# Altium PCB CH32H417QEU-R1.PcbDoc (part 6 of 6)
Units mm, origin at the board's own origin, x right, y up, seen from the top; angles counter-clockwise.
Board outline 125 x 85 mm, 4 copper layers (Top Layer, Layer 1, Layer 2, Bottom Layer), stack 0.603 mm thick; 271 components, 256 nets, 1068 pads, 903 vias.
Unrouted connection lines stored in the file: 143.
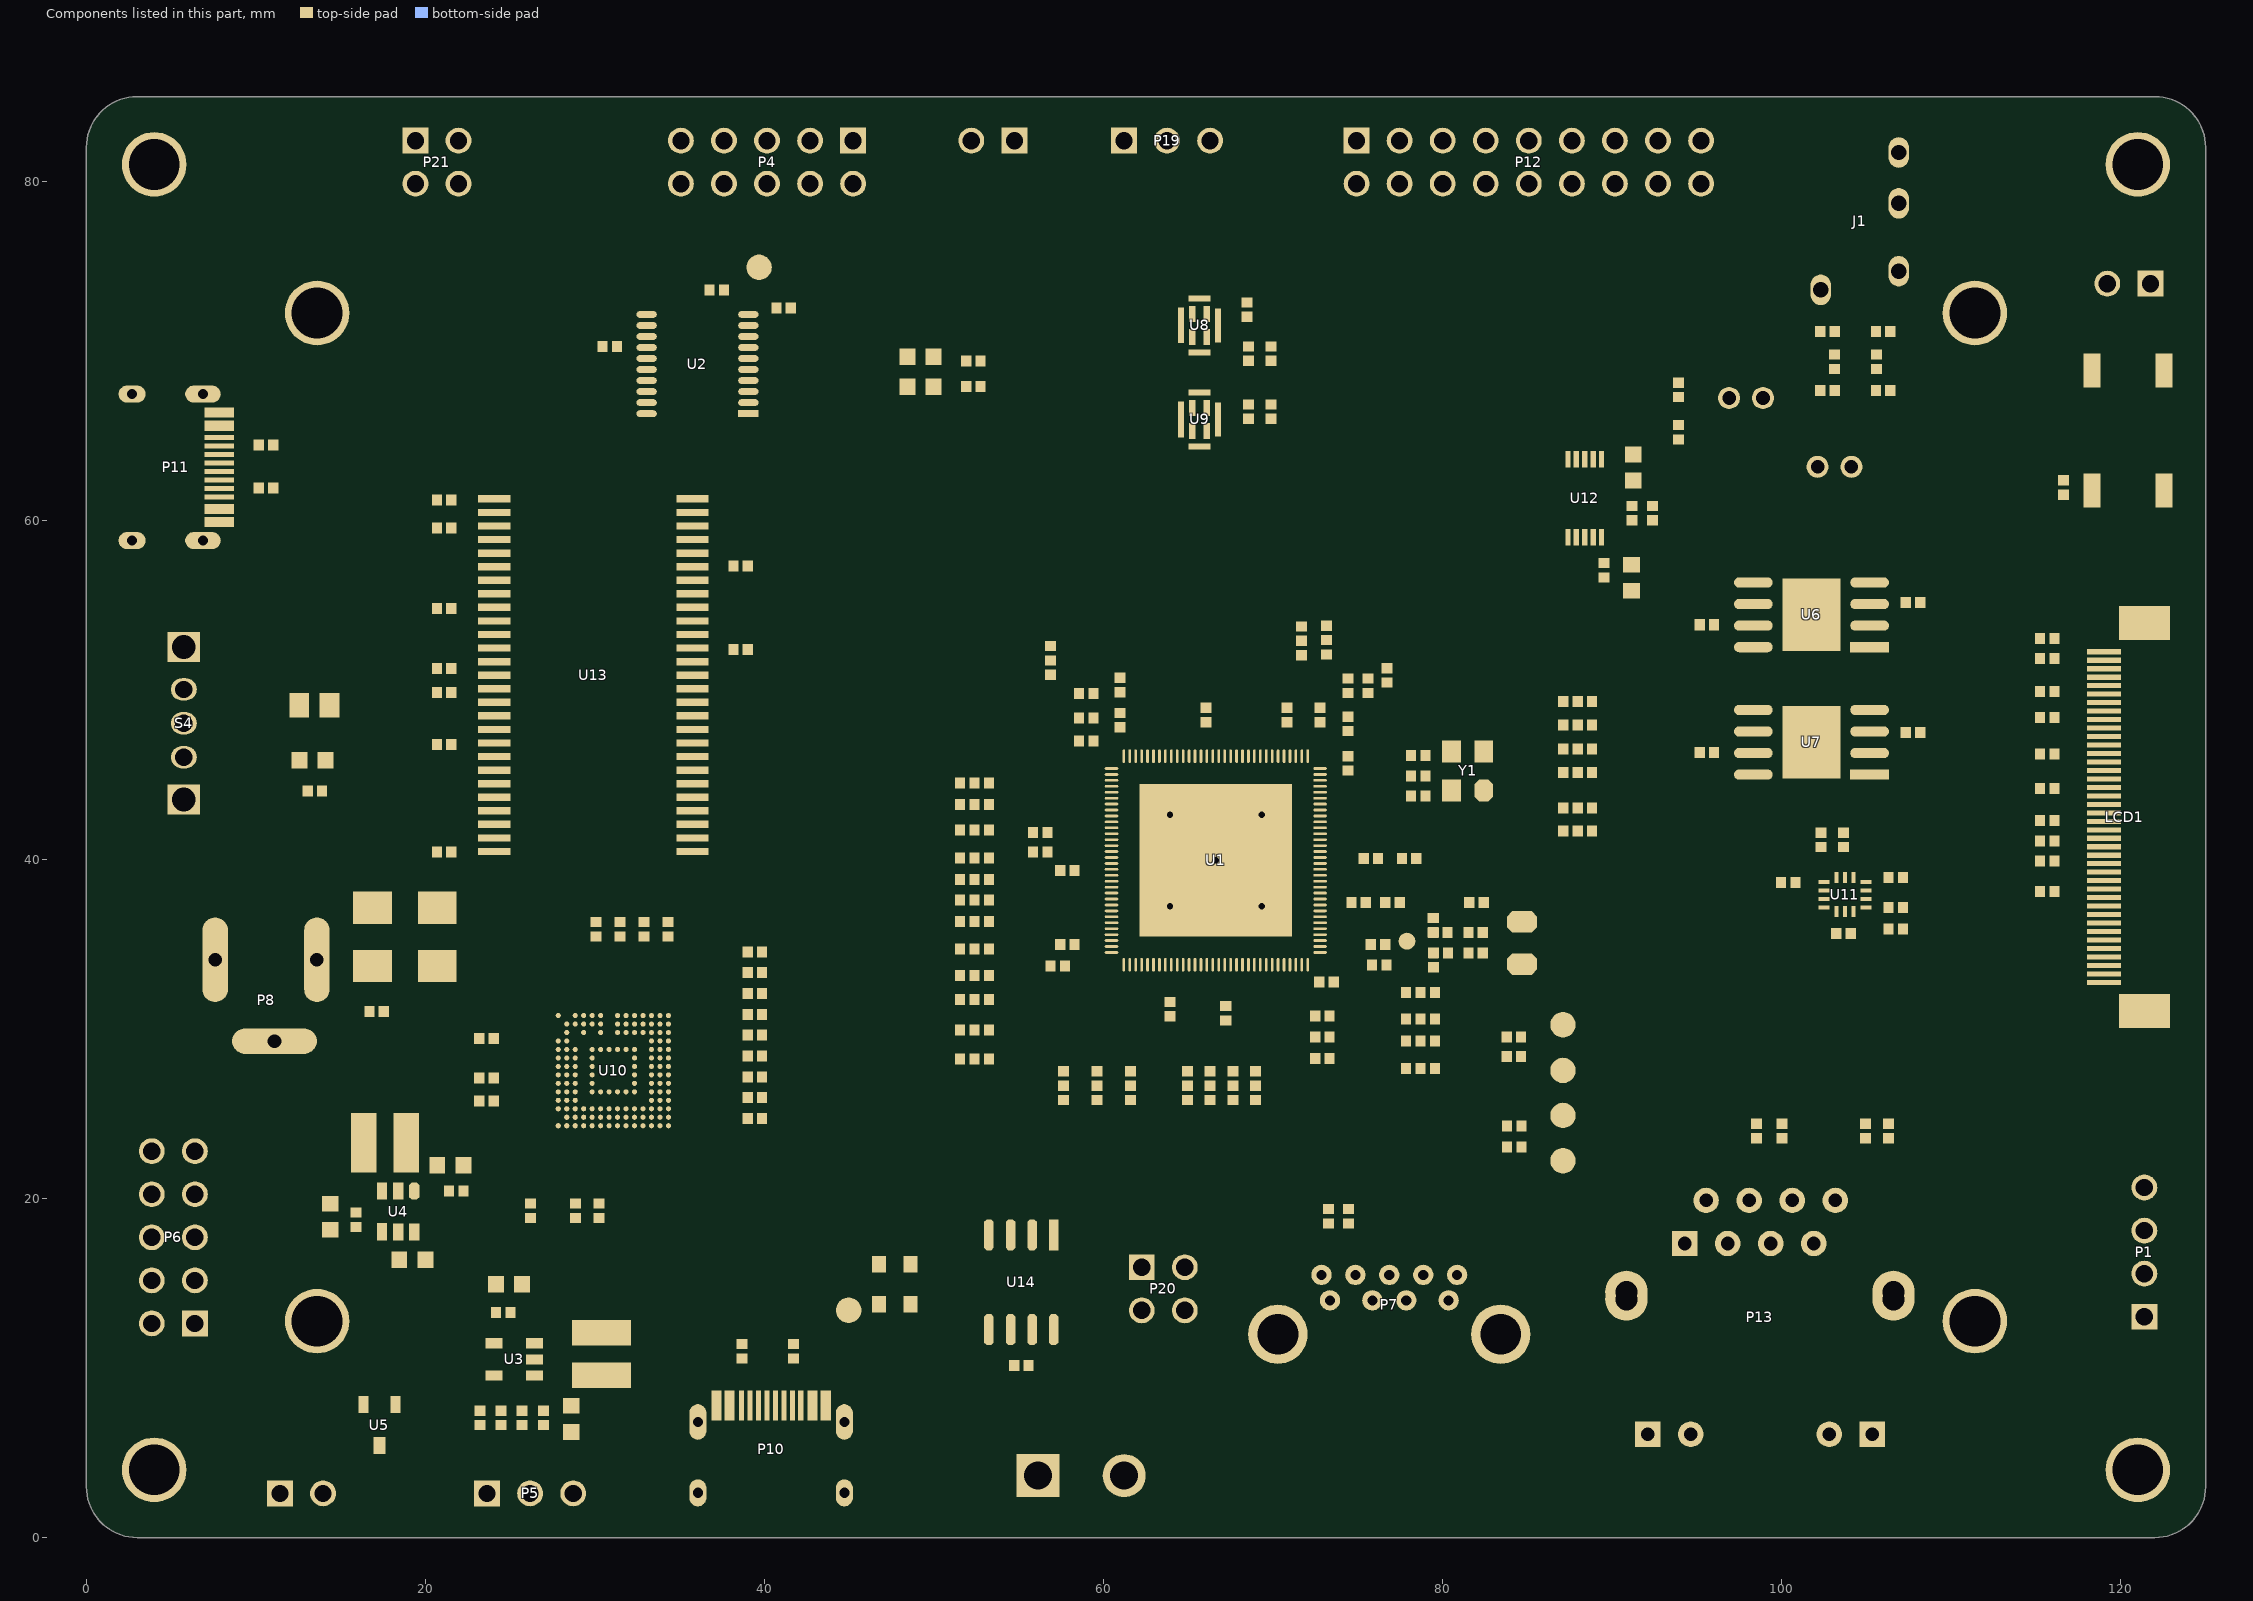
[diagram p8: the components of this part, seen from the top]

## Polygon pours and split planes (outlines as drawn) (continued)
5V on Layer 2 "5V" (solid, remove dead copper, pour order 13): 51.021,7.665 51.021,10.965 51.224,11.168 52.706,11.168 52.787,11.088 52.787,8.254 52.931,8.122 64.641,8.122 67.034,5.728 83.098,5.728 84.885,3.941 113.87,3.941 114.168,4.238 114.168,32.032 114.285,32.149 116.479,32.149 116.638,31.991 116.638,1.907 115.921,1.19 81.576,1.19 80.204,2.562 66.001,2.562 62.716,5.847 54.629,5.847 52.537,3.755 31.54,3.755 29.236,6.06 21.88,6.06 21.726,6.214 21.726,12.354 21.913,12.541 23.726,12.541 23.866,12.397 23.866,8.065 24.069,7.862 30.714,7.862 33.198,5.377 48.733,5.377
LDO_3V3 on Layer 2 "LDO_3V3" (solid, remove dead copper, pour order 14): 19.546,15.581 19.367,15.76 17.639,15.76 17.559,15.68 17.559,3.733 17.68,3.612 27.494,3.612 27.764,3.342 27.764,1.614 27.883,1.531 29.809,1.531 29.882,1.605 29.882,5.065 29.138,5.809 20.107,5.809 19.546,6.37
VBUS_5V on Layer 2 "VBUS_5V" (solid, remove dead copper, pour order 15): 45.265,15.097 57.362,15.097 59.137,13.282 61.26,11.148 67.078,11.148 68.543,9.684 71.996,9.684 72.011,9.669 72.26,9.919 72.26,14.422 72.451,14.613 74.05,14.613 74.327,14.335 74.327,7.253 73.665,6.592 67.164,6.592 65.163,8.593 58.701,8.593 54.377,12.918 19.897,12.918 19.778,13.036 19.769,15.742 19.605,15.905 11.01,15.905 10.513,15.408 10.513,14.34 10.376,14.203 5.651,14.203 5.505,14.32 5.505,15.905 5.821,16.221 7.438,16.221 7.884,16.667 7.884,17.926 8.01,18.052 19.982,18.052 22.937,15.097
VBUS_FS on Layer 2 "VBUS_FS" (solid, remove dead copper, pour order 16): 5.879,21.817 7.63,21.817 11.077,18.37 19.958,18.37 23.001,15.327 46.814,15.327 47.407,15.92 47.407,18.329 47.366,18.37 40.909,18.37 39.841,17.302 23.91,17.302 20.218,20.994 11.754,20.994 8.912,23.836 5.881,23.836 5.647,23.602 5.647,21.995
VBUS_CC on Layer 2 "VBUS_CC" (solid, remove dead copper, pour order 17): 36.008,10.138 35.939,10.068 35.939,8.252 36.133,8.057 44.388,8.057 44.465,8.135 44.465,9.982 44.31,10.138
3V3 on Layer 2 "3V3" (solid, remove dead copper, pour order 19): 21.501,26.506 21.604,26.608 25.164,26.608 25.169,26.613 25.222,26.56 25.222,20.922 25.137,20.837 23.887,20.837 23.808,20.916 23.808,24.448 23.667,24.59 21.579,24.59 21.501,24.667
VIO_1.8 on Layer 2 "VIO_1.8" (solid, remove dead copper, pour order 22): 58.37,41.218 58.37,39.828 58.31,39.768 56.329,39.768 56.269,39.704 56.27,36.985 56.463,36.792 57.59,36.792 59.924,34.458 59.924,32.183 60.124,31.982 64.803,31.982 64.865,31.92 64.865,31.252 64.775,31.162 59.141,31.162 58.929,31.374 58.929,33.618 58.755,33.793 58.117,33.793 58.095,33.821 58.095,35.104 57.314,35.884 55.439,35.884 55.308,36.015 55.308,40.085 55.774,40.551 56.478,40.551 59.516,43.589 61.164,43.589 62.314,44.739 62.314,49.086 62.065,49.335 61.378,49.335 61.317,49.397 61.317,50.423 61.357,50.46 63.348,50.46 63.468,50.34 63.468,44.822 61.303,42.658 59.81,42.658
VDDIO on Layer 2 "VDDIO" (solid, remove dead copper, pour order 24): 66.038,45.976 71.734,45.974 71.76,45.974 71.765,45.969 71.788,45.993 71.788,47.303 71.853,47.367 75.234,47.367 75.311,47.274 75.311,45.922 75.35,45.883 75.878,45.883 75.881,45.881 75.982,45.983 75.982,48.558 75.883,48.657 69.887,48.657 69.852,48.621 69.852,46.956 69.824,46.927 65.989,46.927 65.796,47.121 65.796,48.843 65.688,48.935 63.814,48.935 63.694,48.815 63.694,44.759 61.485,42.55 59.991,42.55 58.575,41.134 58.575,36.144 60.141,34.578 60.141,33.334 60.202,33.274 65.805,33.274 65.983,33.096 65.983,31.028 66.046,30.965 71.483,30.965 72.363,31.844 74.945,31.844 76.068,32.968 76.069,33.971 75.977,34.063 74.935,34.063 74.917,34.045 74.917,33.681 74.806,33.57 66.978,33.57 66.222,34.358 61.433,34.358 61.32,34.471 61.32,35.484 59.52,37.284 59.52,40.715 60.554,41.749 61.811,41.749
VDDK on Layer 2 "VDDK" (solid, remove dead copper, pour order 7): 56.742,33.437 57.233,33.928 57.233,34.595 57.003,34.825 56.297,34.836 51.232,34.836 51.22,34.824 51.065,34.979 51.065,43.154 51.154,43.242 56.41,43.242 56.587,43.065 56.587,42.395 56.285,42.093 52.27,42.093 52.195,42.019 52.195,35.883 52.377,35.701 57.118,35.701 57.839,34.98 57.839,33.843 57.438,33.429 57.438,26.359 57.824,25.973 69.801,25.973 72.537,28.709 80.919,28.709 81.43,29.22 81.43,36.713 81.276,36.866 80.19,36.866 80.109,36.947 80.109,37.883 80.216,37.99 82.218,37.99 82.295,37.913 82.295,27.967 82.181,27.852 73.057,27.852 72.202,26.997 72.202,25.127 71.976,24.901 56.861,24.901 56.742,25.02
VDD33 on Layer 2 "VDD33" (solid, remove dead copper, pour order 8): 76.959,40.771 77.045,40.857 77.853,40.857 77.968,40.742 77.968,39.256 77.76,39.02 77.76,32.893 76.129,31.262 76.129,29.328 75.615,28.815 72.438,28.815 69.752,26.129 57.95,26.129 57.476,26.603 57.476,33.434 57.517,33.605 58.635,33.605 58.728,33.512 58.728,28.644 60.194,27.178 69.318,27.178 71.852,29.712 74.211,29.712 74.991,30.491 74.991,31.018 76.959,32.986
GND on Layer 2 "GND-L3" (solid, remove dead copper, pour order 27): -0.027,85.08 -0.027,-0.004 124.922,-0.004 124.922,84.845
Link_5V on Layer 2 "Link_5V" (solid, remove dead copper, pour order 12): 12.054,59.857 12.054,66.49 11.979,66.565 8.602,66.565 8.325,66.288 8.325,54.883 7.887,54.421 7.887,41.789 7.259,41.161 3.001,41.161 2.581,40.741 2.581,25.649 2.708,25.522 7.376,25.522 7.54,25.685 7.54,28.515 7.43,28.624 6.616,28.624 6.337,28.902 6.337,37.768 6.532,37.963 10.826,37.963 12.054,39.191
3V3 on Layer 2 "3V3" (solid, remove dead copper, pour order 10): 73.574,80.131 73.574,81.328 73.751,81.505 75.727,81.505 75.781,81.559 75.781,83.059 75.664,83.176 70.742,83.176 70.679,83.113 70.679,80.84 70.625,80.802 59.722,80.802 59.59,80.67 59.59,80.605 59.582,75.946 59.582,75.602 59.414,75.433 39.027,75.433 38.613,75.847 38.613,80.567 38.365,80.815 36.984,80.815 36.751,80.583 36.751,59.92 36.477,59.646 23.386,59.646 19.406,55.665 19.406,37.541 19.667,37.28 32.888,37.28 33.495,36.673 33.495,28.672 32.607,27.784 31.556,27.784 31.425,27.652 31.425,25.692 31.638,25.559 35.29,25.559 36.071,26.341 36.071,41.339 35.958,41.452 24.353,41.452 23.62,42.184 23.62,55.011 23.87,55.261 55.946,55.261 56.155,55.065 56.155,50.337 55.895,50.1 51.311,50.1 48.677,47.465 48.677,31.892 49.062,31.507 56.115,31.507 56.658,32.049 56.658,33.488 57.095,33.925 57.095,34.517 56.999,34.613 56.223,34.613 55.691,34.081 55.691,33.052 55.546,32.907 51.146,32.907 50.648,33.404 50.648,46.195 51.025,46.571 55.953,46.571 58.41,49.028 58.41,50.023 58.382,50.023 57.615,50.789 57.615,54.124 62.417,58.926 62.417,77.167 63.34,78.09 70.701,78.09 71.838,76.952 71.838,73.277 72.835,72.28 72.835,66.794 72.508,66.467 69.12,66.467 68.957,66.304 68.957,64.163 69.337,63.784 86.005,63.784 86.086,63.865 86.086,66.169 85.951,66.304 76.492,66.304 76.289,66.507 76.289,72.327 74.384,74.232 74.384,79.311
Link_5V on Bottom Layer "Link_5V" (solid, remove dead copper, pour order 11): 5.582,27.566 5.582,25.681 5.709,25.554 8.178,25.554 8.378,25.354 8.378,18.897 8.102,18.621 5.741,18.621 5.579,18.479 5.579,16.671 5.705,16.545 10.562,16.545 11.214,17.197 11.214,27.52 11.045,27.688 5.704,27.688
3V3 on Bottom Layer "3V3" (solid, remove dead copper, pour order 20): 23.846,22.256 25.475,22.256 25.535,22.196 25.535,17.402 21.634,13.501 21.634,6.903 21.898,6.639 27.035,6.639 27.155,6.519 27.155,2.046 26.834,1.725 25.352,1.725 25.286,1.792 25.286,4.059 25.043,4.302 19.816,4.302 19.534,4.584 19.534,14.249 23.785,18.5 23.785,22.168
3V3 on Bottom Layer "3V3" (solid, remove dead copper, pour order 18): 22.86,25.403 21.097,25.403 21.003,25.496 21.003,40.072 21.118,40.187 22.899,40.187 22.95,40.13 22.95,25.492
VIO_1.8 on Bottom Layer "VIO_1.8" (solid, remove dead copper, pour order 21): 77.223,50.371 77.224,50.37 77.324,50.47 77.324,51.541 77.374,51.592 78.311,51.592 78.377,51.526 78.377,49.774 78.229,49.627 70.628,49.627 69.124,51.13 67.512,51.13 67.277,50.895 67.277,46.311 67.056,46.089 60.151,46.089 59.829,46.411 57.149,46.411 55.932,47.628 55.932,50.482 55.131,51.283 55.131,52.55 55.194,52.606 56.969,52.606 57.13,52.445 57.13,47.615 57.336,47.409 61.922,47.409 62.139,47.625 62.139,49.159 61.97,49.328 61.481,49.328 61.38,49.429 61.38,50.458 61.431,50.508 63.576,50.508 63.652,50.432 63.652,47.082 63.775,46.96 66.295,46.96 66.493,47.158 66.493,52.206 66.518,52.231 69.153,52.231 71.013,50.371
VDDIO on Bottom Layer "VDDIO" (solid, remove dead copper, pour order 23): 60.622,52.299 60.575,52.252 60.575,51.539 60.568,51.532 60.589,51.51 63.988,51.51 64.137,51.362 64.137,47.936 64.271,47.802 65.842,47.802 65.945,47.905 65.945,48.77 65.89,48.825 65.096,48.825 65.001,48.92 65.001,52.211 64.913,52.299
3V3 on Bottom Layer "3V3" (solid, remove dead copper, pour order 25): 57.365,50.133 57.365,48.79 57.501,48.653 60.134,48.653 60.468,48.987 60.468,52.219 60.783,52.534 68.848,52.534 70.935,50.447 74.133,50.447 74.208,50.522 74.208,51.033 74.033,51.208 71.387,51.208 69.184,53.411 60.251,53.411 58.857,52.017 58.857,50.408 58.64,50.191 57.395,50.191
GND on Bottom Layer "GND-L4" (solid, remove dead copper, pour order 28): -0.033,84.992 -0.033,-0.045 125.294,-0.045 125.294,85.136 125.13,85.136
GND on Layer 1 "GND" (solid, remove dead copper, pour order 0): -0.326,85.412 -0.326,-0.204 125.095,-0.204 125.095,85.236

## Keep-outs
Keep-Out Layer:
  the board outline again, w0.254

## Other copper
Top Layer:
  rectangle net 5V: 13.841,48.272 17.35,50.388
  rectangle net VBUS_FS: 44.594,15.237 49.11,17.466
  region net 1V2: 18.785,22.832 21.666,22.832 21.906,22.592 21.906,18.837 21.593,18.524 19.116,18.524 19.073,18.482 19.073,17.499 19.176,17.397 23.336,17.397 23.618,17.679 23.618,23.974 23.344,24.248 18.851,24.248
  region net VIO_1.8: 25.925,19.42 30.588,19.42 30.654,19.486 30.654,20.037 28.41,20.037 28.362,20.085 28.362,20.379 28.287,20.453 25.911,20.453 25.84,20.383 25.84,19.499
  region net Link_5V: 7.121,60.404 8.813,60.404 8.96,60.257 8.96,59.725 9.028,59.657 10.098,59.657 10.197,59.756 10.197,60.932 10.076,61.053 8.781,61.053 8.702,60.974 7.125,60.974
  region net Link_5V: 9.04,66.146 9.04,66.482 9.18,66.622 10.127,66.622 10.179,66.57 10.179,65.182 10.094,65.096 9.023,65.096 8.833,65.287 7.353,65.287 7.324,65.772 7.415,65.862 8.757,65.862
  region net LDO_3V3: 18.702,18.388 18.702,17.332 18.977,17.057 18.977,16.043 19.444,15.575 19.444,14.284 19.378,14.218 18.068,14.218 17.975,14.31 17.975,17.024 18.09,17.139 18.09,18.397 18.119,18.426 18.664,18.426
  region net VBUS_CC: 38.242,10.054 38.189,10.107 36.415,10.107 36.333,10.025 36.333,8.886 36.357,8.862 37.537,8.862 37.636,8.763 37.636,6.976 38.201,6.969 38.242,7.009
  region net VBUS_CC: 49.2,11.857 49.317,11.974 49.317,14.416 49.217,14.529 43.917,14.529 43.108,13.719 43.108,10.453 42.57,9.915 42.57,7.322 43.108,7.337 43.108,8.816 43.284,8.992 44.209,8.992 45.344,10.127 45.344,11.742 45.459,11.857
  region net PIN_5V: 5.843,13.526 7.951,13.526 8.159,13.319 8.159,9.134 8.415,8.879 16.721,8.879 16.878,8.722 16.878,7.121 16.77,7.013 5.83,7.013 5.601,7.242 5.601,13.404
  region net 5V_IN: 18.275,6.092 10.626,6.092 10.29,5.756 10.29,1.699 10.498,1.49 12.182,1.49 12.278,1.586 12.278,3.735 12.663,4.12 18.307,4.12 18.419,4.232 18.419,5.948
  region net DC_3V3: 29.658,10.235 29.658,7.067 29.489,6.898 23.999,6.898 23.891,6.79 23.891,5.499 22.753,4.361 22.753,1.762 22.892,1.623 24.43,1.623 24.706,1.9 24.706,3.838 24.691,3.853 26.121,5.283 30.873,5.283 31.503,5.914 31.503,10.204
  pour cut-out: 68.678,25.043 69.445,24.276 69.445,12.056 70.674,10.827 81.523,10.827 82.451,11.755 82.451,21.444 75.001,28.894 75.001,31.171 74.32,31.852 72.873,31.852 71.996,32.729 71.996,34.091 71.799,34.288 68.872,34.288 68.728,34.143
  pour cut-out: 72.445,38.152 86.36,38.152 91.092,33.421 91.092,15.247 92.787,13.552 99.699,13.552 101.825,15.678 101.825,23.455 101.32,23.96 98.078,23.96 97.924,24.113 97.924,39.369 96.217,41.077 80.957,41.077 79.555,39.675 72.245,39.675 72.132,39.562 72.132,38.236
  pour cut-out: 61.033,45.65 72.31,45.65 72.31,34.409 61.006,34.409
  pour cut-out: 28.377,12.86 28.377,8.83 32.346,8.83 32.346,12.832
  pour cut-out: 15.608,25.303 15.608,21.554 19.54,21.554 19.54,25.303
Layer 1:
  rectangle net GND: 62.851,36.144 70.4,43.795
Layer 2:
  region net GND: 61.957,41.529 64.233,43.805 70.23,43.805 70.865,43.17 70.865,36.621 70.366,36.122 63.227,36.122 61.811,37.538 61.811,41.468
Bottom Layer:
  region net GND: 62.437,43.427 69.345,43.427 69.999,42.773 69.999,36.714 69.769,36.484 62.72,36.484 62.013,37.19 62.013,43.091

## Silkscreen, mask and mechanical layers (free items; w line width, h text height)
Top Overlay:
  region: 71.836,82.995 73.158,82.457 71.866,81.875 72.11,82.422
  region: 71.836,77.617 73.158,77.078 71.866,76.496 72.11,77.043
  region: 32.12,83.055 33.442,82.517 32.15,81.935 32.394,82.481
  region: 45.369,77.16 46.691,76.621 45.398,76.039 45.643,76.586
  lines w0.152: 21.937,8.587 21.937,5.508 27.046,5.508 27.046,5.84 ; 46.606,74.649 55.314,74.649 ; 73.681,73.818 96.443,73.818 ; 77.819,46.984 77.819,50.615 78.692,50.615 ; 80.813,41.499 80.508,41.499 80.508,37.337 80.864,37.337
  text "LINK_RST" at 10.756,81.917 h0.89
  text "MCU_RST" at 23.988,81.917 h0.89
  text "LINK_RST" at 46.843,81.904 h0.89 r270
  text "PIOC_IO0" at 60.383,80.734 h0.89 r270
  text "HSADC" at 63.15,80.734 h0.89 r270
  text "GND" at 65.768,80.734 h0.89 r270
  text "GND" at 50.078,79.435 h0.89
  text "LK_RST" at 53.254,79.287 h0.89
  text "LINK_RX" at 11.644,79.06 h0.89
  text "MCU_TX" at 23.988,79.06 h0.89
  text "3V3" at 74.294,78.462 h0.89 r270
  text "VSYNC" at 76.833,78.462 h0.89 r270
  text "HSYNC" at 79.373,78.462 h0.89 r270
  text "RESET" at 81.912,78.462 h0.89 r270
  text "D1" at 84.452,78.462 h0.89 r270
  text "D3" at 86.991,78.462 h0.89 r270
  text "D5" at 89.531,78.462 h0.89 r270
  text "D7" at 92.07,78.462 h0.89 r270
  text "LINK" at 54.535,78.349 h0.89 r270
  text "TDO" at 50.147,77.608 h0.89 r270
  text "_TX" at 51.751,77.608 h0.89 r270
  text "_RX" at 53.318,77.608 h0.89 r270
  text "TDI" at 48.544,77.312 h0.89 r270
  text "PC13" at 116.747,75.581 h0.89
  text "KEY" at 121.174,75.581 h0.89
  text "5V" at 46.94,74.48 h0.89 r270
  text "3V3" at 48.619,74.48 h0.89 r270
  text "GND" at 50.298,74.48 h0.89 r270
  text "SWDIO" at 51.977,74.48 h0.89 r270
  text "SWCLK" at 53.656,74.48 h0.89 r270
  text "GND" at 74.294,73.379 h0.89 r270
  text "SCL" at 76.833,73.379 h0.89 r270
  text "SDA" at 79.373,73.379 h0.89 r270
  text "D0" at 81.912,73.379 h0.89 r270
  text "D2" at 84.452,73.379 h0.89 r270
  text "D4" at 86.991,73.379 h0.89 r270
  text "D6" at 89.531,73.379 h0.89 r270
  text "PCLK" at 92.07,73.379 h0.89 r270
  text "PWDN" at 94.61,73.379 h0.89 r270
  text "DOWNLOAD" at 0.507,68.3 h2.03
  text "ON" at 1.374,51.357 h0.89 r270
  text "OFF" at 1.374,46.686 h0.89 r270
  text "SERDES_RXN" at 88.424,29.548 h0.89
  text "SERDES_RXP" at 88.424,26.921 h0.89
  text "SERDES_TXN" at 88.424,24.294 h0.89
  text "VBUS_FS" at 7.838,22.17 h0.89
  text "SERDES_TXP" at 88.424,21.666 h0.89
  text "LED1" at 116.315,20.104 h0.89
  text "DC_5V" at 7.838,19.6 h0.89
  text "LINK" at 57.742,18.595 h0.89
  text "MCU" at 66.456,18.595 h0.89
  text "HS+SS" at 75.718,18.152 h2.03
  text "PC12" at 116.167,17.5 h0.89
  text "LINK_5V" at 7.745,16.931 h0.89
  text "CLK" at 58.024,15.386 h0.89
  text "CLK" at 66.402,15.386 h0.89
  text "PA2" at 116.908,14.896 h0.89
  text "VBUS_SS" at 7.838,14.711 h0.89
  text "PIN_5V" at 7.786,13.475 h0.89 r270
  text "DIO" at 58.024,12.667 h0.89
  text "DIO" at 66.402,12.667 h0.89
  text "FS" at 38.608,12.446 h2.03
  text "LED0" at 116.019,12.292 h0.89
  text "L" at 55.761,8.051 h0.89
  text "H" at 60.493,8.051 h0.89
  text "CH32H417QEU-R1-1v1" at 108.001,7.834 h0.89
  text "5V" at 10.151,4.218 h0.89
  text "GND" at 12.623,4.218 h0.89
  text "DC3V3" at 19.894,4.069 h0.89
  text "3V3" at 24.742,4.069 h0.89
  text "LDO3V3" at 27.783,4.069 h0.89
Bottom Overlay:
  lines w0.254: 9.8,8.955 9.8,76.045 115.2,76.045 115.2,8.955 9.8,8.955
Top Solder:
  drawing of 3656 lines, arcs and shapes, not listed
  text "https://wch.cn" at 15.435,65.723 h2.5
Mechanical 1:
  the board outline again, w0.254

## Text inside footprints (layer, text, board x,y; h text height)
D1: Top Overlay "+" at 47.463,69.375 h1.02 r90
D2: Top Overlay "+" at 47.463,67.595 h1.02 r90
D3: Top Overlay "+" at 11.6,45.566 h1.02 r90
P7: Bottom Overlay "T+" at 73.224,12.954 h0.8 r90; Bottom Overlay "T-" at 75.154,12.954 h0.8 r90; Bottom Overlay "G" at 77.237,12.954 h0.8 r90; Bottom Overlay "R+" at 79.32,12.954 h0.8 r90; Bottom Overlay "R-" at 81.123,12.954 h0.8 r90; Bottom Overlay "G" at 80.666,10.693 h0.8 r90; Bottom Overlay "D+" at 78.126,10.693 h0.8 r90; Bottom Overlay "D-" at 76.094,10.693 h0.8 r90; Bottom Overlay "V" at 73.757,10.693 h0.8 r90